# Allegro board ex2_rlc.brd
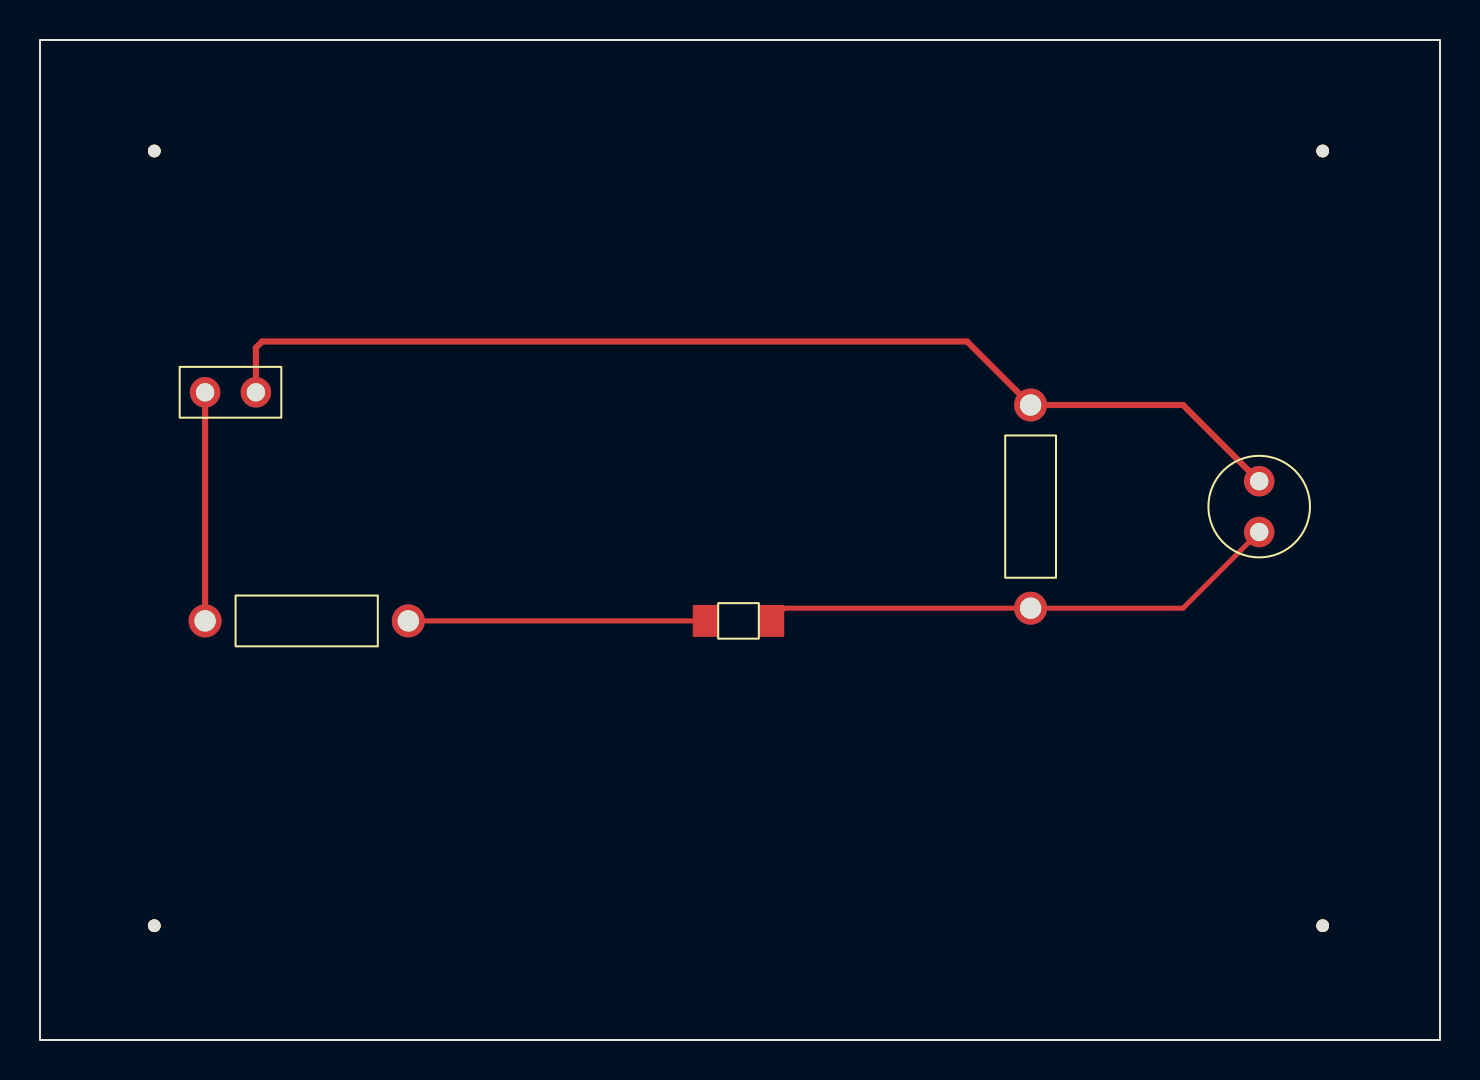
[diagram p0: board, top side]
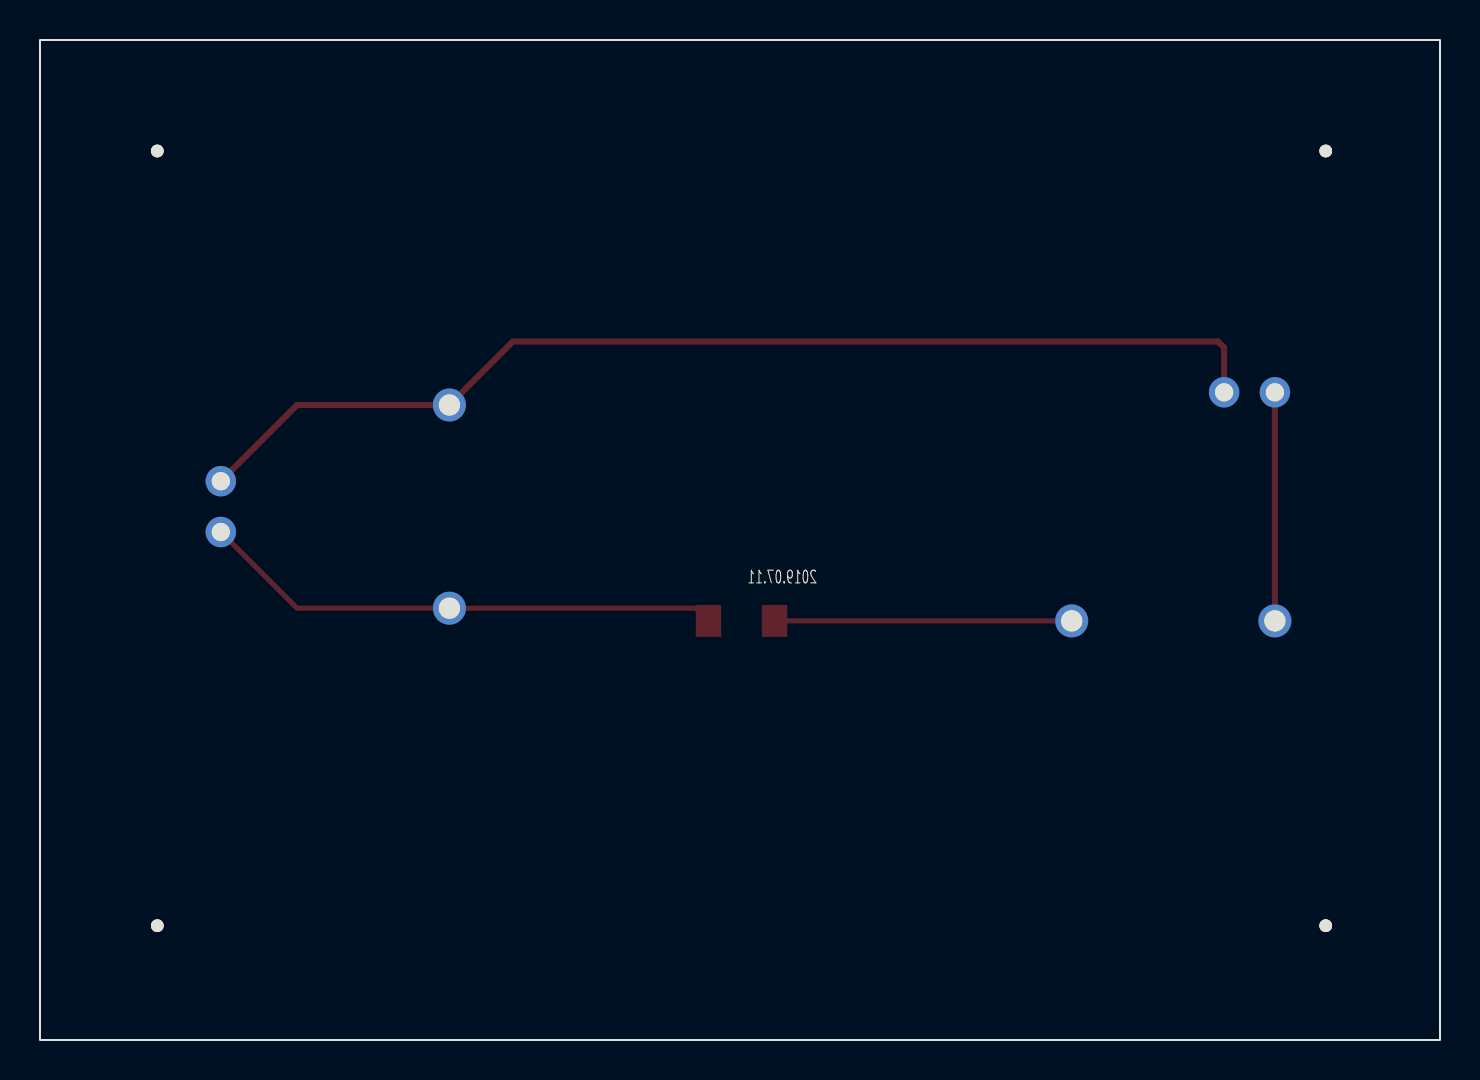
[diagram p1: board, bottom side, seen from below]

Outline 70 x 50 mm; copper layers: TOP, BOTTOM. Coordinates in mm from the lower left corner of the outline.
Outline path: rectangle 0,0 70,50

## Design rules (mm)
net group BASE: nets KKK N00096
net group POWERNET: nets GND VCC

## Placement (name value [footprint] x y rotation side)
C1  1u  [CAP196]  60.96 25.4 0 top
J1  CON2  [JUMPER2]  10.79 32.38 180 top
L1  100n  [SMDRES]  34.92 20.95 0 top
NOREF  -  [unnamed]  5.71 44.45 0 top
NOREF#2  -  [unnamed]  64.14 44.45 0 top
NOREF#3  -  [unnamed]  5.71 5.71 0 top
NOREF#4  -  [unnamed]  64.14 5.71 0 top
R1  330  [RES400]  8.26 20.95 270 top
R2  330  [RES400]  49.53 21.59 0 top

## Library data of the parts
C1 = CAP NP: Tolerance: ***; User Part Number: ***
J1 = CON2: User Part Number: ***
L1 = INDUCTOR: Tolerance: ***; User Part Number: ***
R1 R2 = R: Tolerance: ***; User Part Number: ***

## Footprints (pads in the part's own frame, mm; a bottom-side part is the same pattern mirrored in y, then rotated)
CAP196
  round 1.524 hole 0.914: 1(0,0) 2(0,2.54)
JUMPER2
  round 1.524 hole 0.914: 1(0,0) 2(2.54,0)
RES400
  round 1.651 hole 1.067: 1(0,0) 2(0,10.16)
SMDRES
  rect 1.27x1.6 smd: 1(-1.651,0) 2(1.651,0)
unnamed
  round 0.635 hole 3.175 unplated: (0,0)

## Nets
GND: C1.2 J1.1 R2.2
VCC: J1.2 R1.1
KKK: L1.1 R1.2
N00096: C1.1 L1.2 R2.1

## Routing (per net, layer and track width the routed paths; a pad name or vN(x,y) marks a point on that pad's centre or on a via; arc(x,y) is an arc through that point)
GND: length 55.4
  TOP w0.308: J1.1 10.79,34.62 11.1,34.92 46.35,34.92 R2.2 57.15,31.75 C1.2
VCC: length 11.4
  TOP w0.308: R1.1 8.26,32.38
KKK: length 14.9
  TOP w0.254: R1.2 L1.1
N00096: length 26.2
  TOP w0.254: L1.2 37.21,21.59 R2.1 57.15,21.59 C1.1

## Text on the board
Ref Des/Silkscreen Bottom: 2019.07.11
TOLERANCE_TOP: FIGURE | FINISHED_SIZE | 0.914 | 1.067 | 3.175 | DRILL CHART: TOP to BOTTOM | ALL UNITS ARE IN MILLIMETERS | PLATED | NON-PLATED | QTY | 4
